# EAGLE board AtMEGA32u4-uSD-AddON-v01a (EAGLE 5.11)
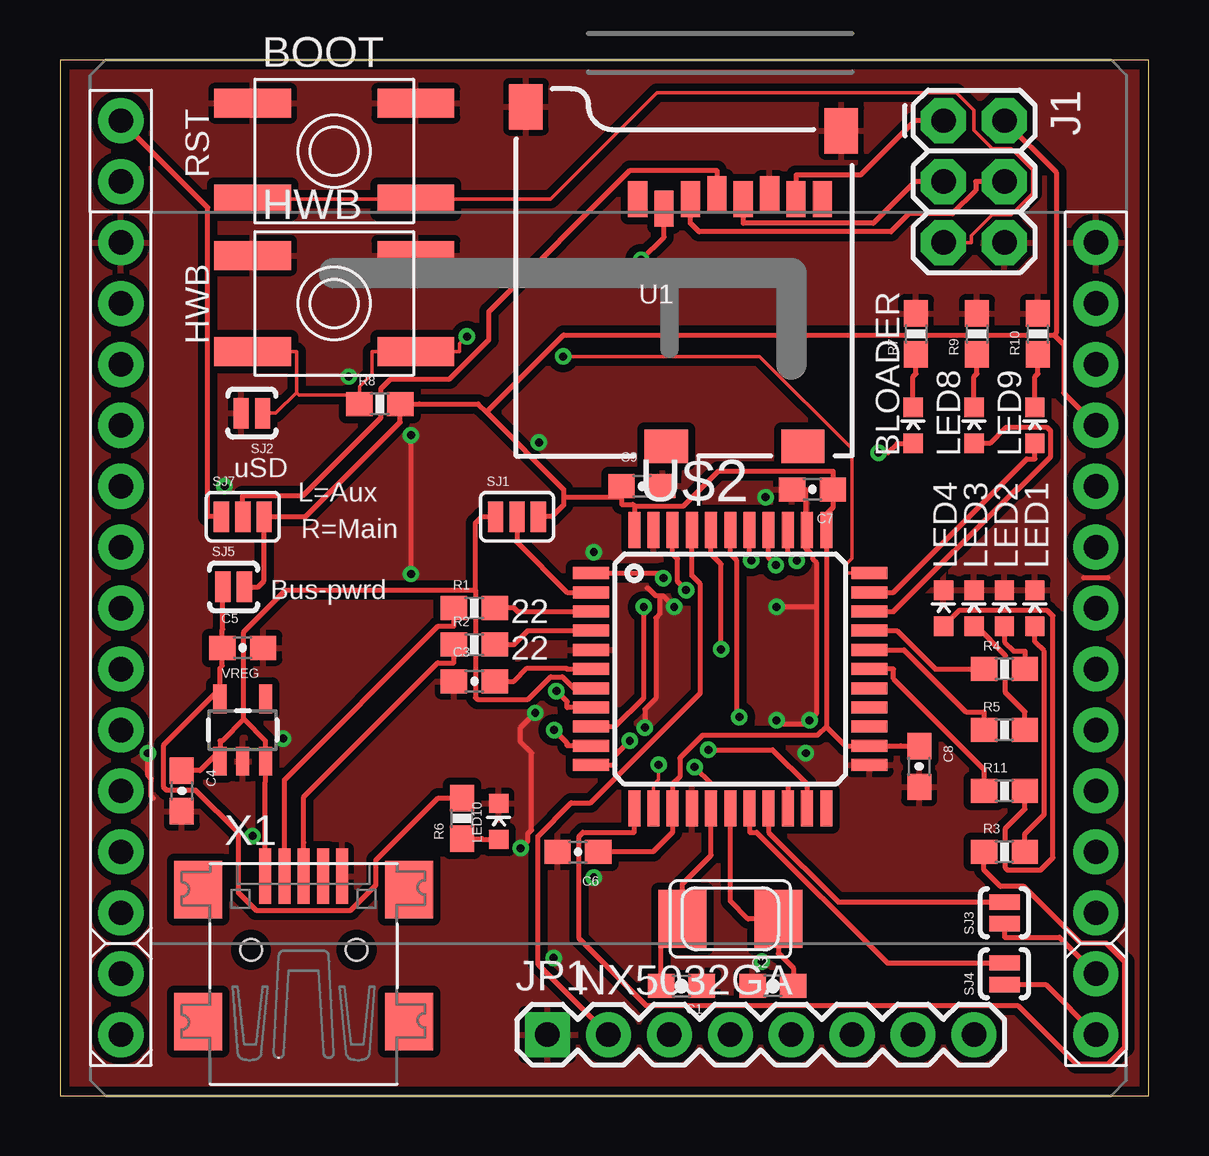
[diagram p0: board, top side]
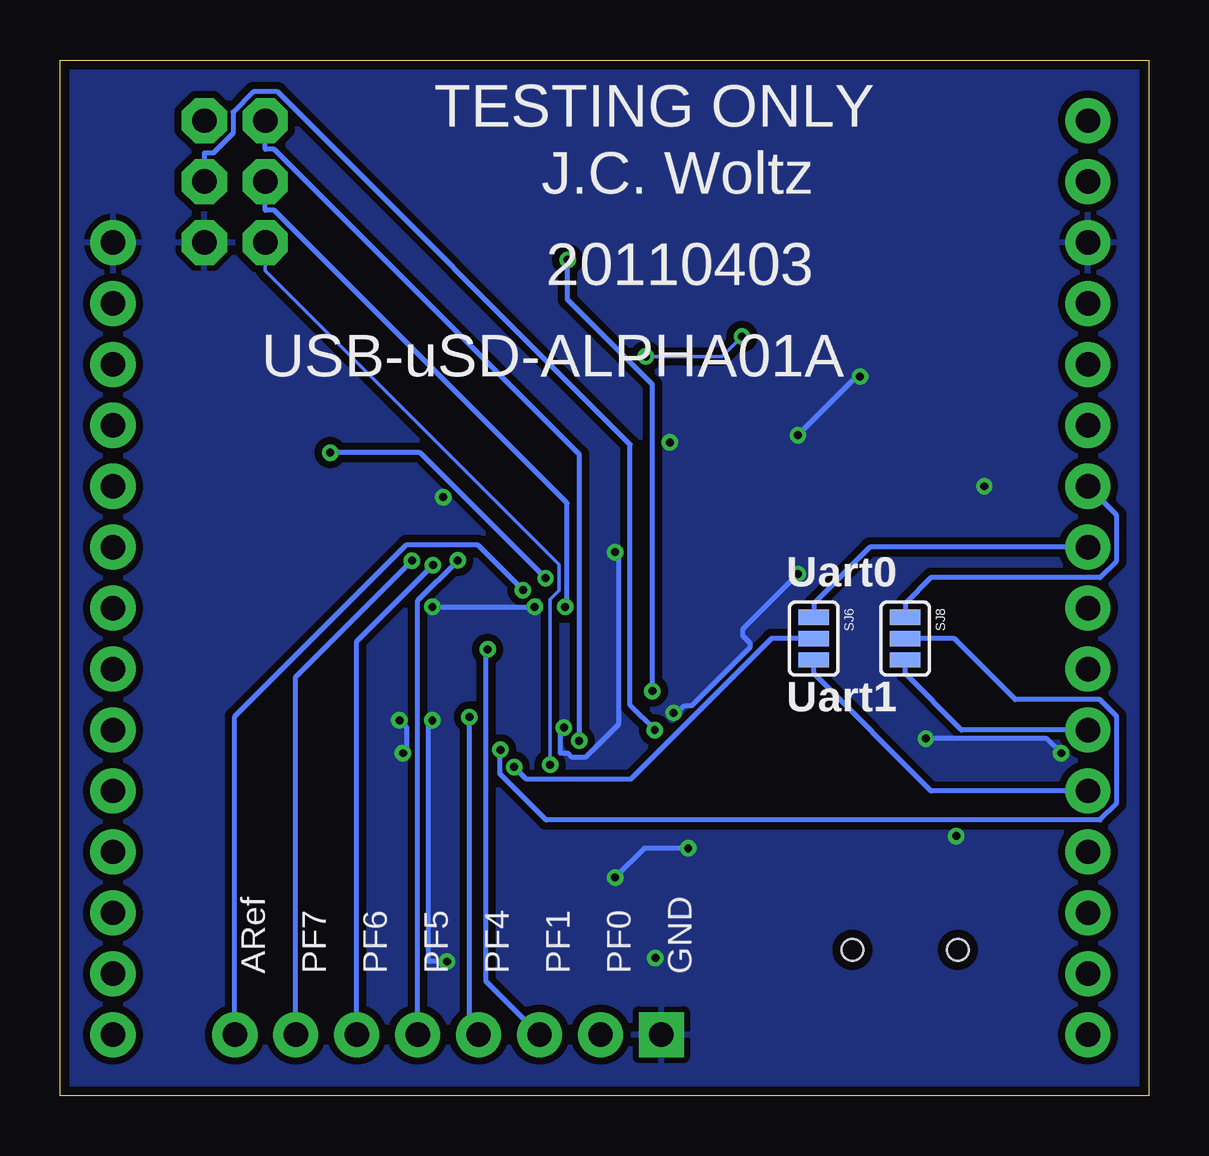
[diagram p1: board, bottom side, seen from below]

Size 45.39 x 43.17 mm. Coordinates in mm from the lower left corner, seen from the top.
Outline: 0,0 45.39,0 45.39,43.17 0,43.17 0,0
Copper layers (1*16): Top 0.0356mm / dielectric 1.5011mm / Bottom 0.0356mm
Design rules "LaenPCBOrder-JCModified": minimum track width 6mil, minimum drill 13mil, track to track 6mil, track to pad 6mil, pad to pad 6mil, via to via 6mil, smd to smd 6mil, copper to edge 15mil, drill to drill 6mil, minimum pad ring 12mil, minimum via ring 7mil, stop-mask expansion 4mil, vias tented up to drill 25mil, thermal gap 10mil
Net classes: 0 default: width 0.203 mm; 1 smallsignal: width 0.152 mm; 2 bigsignal: width 0.356 mm

## Footprints (pad centres in the part's own frame; a part is rotated, then mirrored left to right if it is on the bottom)
LED-0603 = smd 0.8 x 0.8: A 0,-0.75; C 0,0.75
EVQ-Q2 = smd 3.2 x 1.2: A -3.4,-2; A' 3.4,-2; B -3.4,2; B' 3.4,2
0603-CAP = smd 1.1 x 1: 1 -0.85,0; 2 0.85,0
2X3 = drill 1.016 pad 1.88 octagon: 1 0,0; 2 0,2.54; 3 2.54,0; 4 2.54,2.54; 5 5.08,0; 6 5.08,2.54
1X08 = drill 1.016 pad 1.88 square: 1 0,0 | drill 1.016 pad 1.88 round: 2 2.54,0; 3 5.08,0; 4 7.62,0; 5 10.16,0; 6 12.7,0; 7 15.24,0; 8 17.78,0
NX5032 = smd 2 x 2.4: P$1 2,0; P$2 -2,0
0603-RES = smd 1.1 x 1: 1 -0.85,0; 2 0.85,0
SJ_3_PASTE2&3 = smd 0.635 x 1.27: 1 -0.889,0; 2 0,0; 3 0.889,0
SJ_2S-NO = smd 0.635 x 1.27: 1 -0.45,0; 2 0.45,0
SJ_3_PASTE1&2 = smd 0.635 x 1.27: 1 -0.889,0; 2 0,0; 3 0.889,0
MICRO-SD-SOCKET-PP = smd 0.8 x 1.5: 1 -8.94,10.7; 2 -7.84,10.3; 3 -6.74,10.7; 4 -5.64,10.9; 5 -4.54,10.7; 6 -3.44,10.9; 7 -2.34,10.7; 8 -1.24,10.7 | smd 1.8 x 1.4: CD1 -2.05,0.4; CD2 -7.75,0.4 | smd 1.4 x 1.9: GND1 -13.6,14.55; GND3 -0.45,13.55
SYNSJ-STACK = drill 1.016 pad 1.88 round: G0 0,-7.62; G1 0,-10.16; G2 0,-12.7; G3 0,-15.24; G4 0,-17.78; G5 0,-20.32; G6 0,-22.86; G7 0,-25.4; G8 0,-27.94; G9 0,-30.48; G10 0,-33.02; G11 40.64,-33.02; G12 40.64,-30.48; G13 40.64,-27.94; G14 40.64,-25.4; G15 40.64,-22.86; G16 40.64,-20.32; G17 40.64,-17.78; G18 40.64,-15.24; GND 0,-5.08; GND1 40.64,-5.08; R1 0,0; R2 0,-2.54; R3 0,-35.56; R4 0,-38.1; R5 40.64,-38.1; R6 40.64,-35.56; RESERVED 40.64,-10.16; RESET 40.64,-7.62; VCC 40.64,-12.7
TQFP44 = smd 1.5 x 0.5: 1 -5.8,4; 2 -5.8,3.2; 3 -5.8,2.4; 4 -5.8,1.6; 5 -5.8,0.8; 6 -5.8,0; 7 -5.8,-0.8; 8 -5.8,-1.6; 9 -5.8,-2.4; 10 -5.8,-3.2; 11 -5.8,-4; 23 5.8,-4; 24 5.8,-3.2; 25 5.8,-2.4; 26 5.8,-1.6; 27 5.8,-0.8; 28 5.8,0; 29 5.8,0.8; 30 5.8,1.6; 31 5.8,2.4; 32 5.8,3.2; 33 5.8,4 | smd 0.5 x 1.5: 12 -4,-5.8; 13 -3.2,-5.8; 14 -2.4,-5.8; 15 -1.6,-5.8; 16 -0.8,-5.8; 17 0,-5.8; 18 0.8,-5.8; 19 1.6,-5.8; 20 2.4,-5.8; 21 3.2,-5.8; 22 4,-5.8; 34 4,5.8; 35 3.2,5.8; 36 2.4,5.8; 37 1.6,5.8; 38 0.8,5.8; 39 0,5.8; 40 -0.8,5.8; 41 -1.6,5.8; 42 -2.4,5.8; 43 -3.2,5.8; 44 -4,5.8
SOT23-5 = smd 0.55 x 1.2: 1 -0.95,-1.3; 2 0,-1.3; 3 0.95,-1.3; 4 0.95,1.3; 5 -0.95,1.3
USB-MINIB = smd 0.5 x 2.308: D+ 0,4.064; D- -0.8,4.064; GND 1.6,4.064; ID 0.8,4.064; VBUS -1.6,4.064 | smd 2 x 2.4: GND1 -4.4,-2; GND2 -4.4,3.5; GND3 4.4,3.5; GND4 4.4,-2 | hole 0.9: -2.2,1; 2.2,1

## Placement (x,y rotation side)
BLOADER  RED  [LED-0603]  35.56,27.94 0 top
BOOT  EVQQ2  [EVQ-Q2]  11.43,39.37 0 top
C1  12pF  [0603-CAP]  25.91,4.57 180 top
C2  12pF  [0603-CAP]  29.72,4.57 0 top
C3  1uF  [0603-CAP]  17.27,17.27 0 top
C4  1uF  [0603-CAP]  5.08,12.7 270 top
C5  1uF  [0603-CAP]  7.62,18.67 0 top
C6  1uF  [0603-CAP]  21.59,10.16 180 top
C7  1uF  [0603-CAP]  31.37,25.27 180 top
C8  1uF  [0603-CAP]  35.81,13.72 270 top
C9  1uF  [0603-CAP]  24.26,25.4 0 top
HWB  EVQQ2  [EVQ-Q2]  11.43,33.02 0 top
J1  AVR_SPI_PRG_6PTH  [2X3]  36.83,40.64 270 top
JP1  [1X08]  20.32,2.54 0 top
LED1  red  [LED-0603]  40.64,20.32 0 top
LED2  blue  [LED-0603]  39.37,20.32 0 top
LED3  orange  [LED-0603]  38.1,20.32 0 top
LED4  green  [LED-0603]  36.83,20.32 0 top
LED8  RED  [LED-0603]  38.1,27.94 0 top
LED9  RED  [LED-0603]  40.64,27.94 0 top
LED10  GREEN  [LED-0603]  18.29,11.43 0 top
NX5032GA  8MHz  [NX5032]  27.94,7.37 180 top
R1  22  [0603-RES]  17.27,20.32 0 top
R2  22  [0603-RES]  17.27,18.8 0 top
R3  220  [0603-RES]  39.37,10.16 0 top
R4  220  [0603-RES]  39.37,17.78 0 top
R5  220  [0603-RES]  39.37,15.24 0 top
R6  1K  [0603-RES]  16.76,11.56 90 top
R7  1K  [0603-RES]  35.69,31.75 90 top
R8  10K  [0603-RES]  13.33,28.83 0 top
R9  1K  [0603-RES]  38.23,31.75 90 top
R10  1K  [0603-RES]  40.77,31.75 90 top
R11  220  [0603-RES]  39.37,12.7 0 top
SJ1  [SJ_3_PASTE2&3]  19.05,24.13 0 top
SJ2  HWB  [SJ_2S-NO]  8,28.45 180 top
SJ3  SOLDERJUMPERNO  [SJ_2S-NO]  39.37,7.62 90 top
SJ4  SOLDERJUMPERNO  [SJ_2S-NO]  39.37,5.08 90 top
SJ5  SOLDERJUMPERNO  [SJ_2S-NO]  7.24,21.21 0 top
SJ6  [SJ_3_PASTE1&2]  13.97,19.05 270 bottom
SJ7  [SJ_3_PASTE1&2]  7.62,24.13 0 top
SJ8  [SJ_3_PASTE1&2]  10.16,19.05 270 bottom
U1  USD-SOCKETNEW  [MICRO-SD-SOCKET-PP]  33.02,26.67 0 top
U$1  SYNAPSE-SJ-STCKINGD30-1600  [SYNSJ-STACK]  2.54,40.64 0 top
U$2  ATMEGA32U4-AU  [TQFP44]  27.94,17.78 0 top
U$5  CREATIVE_COMMONS  [CREATIVE_COMMONS]  3.81,-8.89 0 top  (outside the outline)
VREG  MCP1802  [SOT23-5]  7.62,15.24 0 top
X1  USBSMD  [USB-MINIB]  10.16,5.08 0 top

## Library data of the parts
BLOADER C3-C9 LED1-LED4 LED8-LED10 R1-R11 U$1 U$5 VREG X1 = 0_jc-custom
BOOT HWB = adaprog
C1 C2 J1 JP1 SJ1-SJ8 = SparkFun
NX5032GA U$2 = adafruit
U1 = 0_jc-modified

## Nets
AREF-7: JP1.8 U$2.42
GND: BOOT.B BOOT.B' C1.1 C2.1 C3.1 C4.2 C5.2 C6.2 C7.2 C8.2 C9.2 HWB.B HWB.B' J1.6 JP1.1 LED1.C LED2.C LED3.C LED4.C LED10.C R7.2 R9.2 R10.2 SJ2.2 U1.6 U1.GND1 U1.GND3 U$1.GND U$1.GND1 U$2.5 U$2.15 U$2.23 U$2.35 U$2.43 VREG.2 X1.GND
HWB [smallsignal]: HWB.A HWB.A' R8.1 SJ2.1 U$2.33
MISO: J1.1 U1.7 U$2.11
MOSI: J1.4 U1.3 U$2.10
MVOUT: C5.1 R6.2 SJ5.1 VREG.5
N$1: LED9.C R10.1
N$2: LED1.A R3.2
N$3: SJ7.2 U1.4
N$4: C3.2 U$2.6
N$5: LED4.A R11.2
N$7: LED2.A R4.2
N$8: LED10.A R6.1
N$9: LED8.C R9.1
N$10: BLOADER.C R7.1
N$11: SJ3.1 U$1.R6
N$12: LED3.A R5.2
N$13: SJ4.1 U$1.R5
N$14: SJ8.1 U$1.G3
N$15: SJ6.1 U$1.G4
N$16: SJ8.3 U$1.G7
N$17: SJ6.3 U$1.G8
N$38: U1.CD1
N$40: U1.CD2
PB4-GRN-L4: R11.1 U$2.28
PB5-ORANGE-L3: R5.1 U$2.29
PB6-BLUE-L2: R4.1 U$2.30
PB7-RED-L1: R3.1 U$2.12
PC6-LED8: LED8.A U$2.31
PC7-LED9: LED9.A U$2.32
PD4: U$2.25
PD5: U$2.22
PD6: U$2.26
PD7: U$2.27
PE6-LED-BOOTLOADER: BLOADER.A U$2.1
PF0-2: JP1.2 U$2.41
PF1-3: JP1.3 U$2.40
PF4-4: JP1.4 U$2.39
PF5-5: JP1.5 U$2.38
PF6-6: JP1.6 U$2.37
PF7-7: JP1.7 U$2.36
RESET: U$1.RESET
RST [smallsignal]: BOOT.A BOOT.A' J1.5 U$2.13
RX1: SJ8.2 U$2.21
SCK: J1.3 U1.5 U$2.9
SCL: SJ4.2 U$2.18
SD_CS: U1.2 U$2.8
SDA: SJ3.2 U$2.19
TX1: SJ6.2 U$2.20
UD+: R2.2 U$2.4
UD-: R1.2 U$2.3
UDM: R1.1 X1.D-
UDP: R2.1 X1.D+
UVCC: SJ1.2 U$2.2
VBUS: C4.1 SJ1.1 U$2.7 VREG.1 VREG.3 X1.VBUS
VCC3: C6.1 C7.1 C8.1 C9.1 J1.2 R8.2 SJ1.3 SJ5.2 SJ7.3 U$1.VCC U$2.14 U$2.24 U$2.34 U$2.44
VCC3A: SJ7.1 U$1.R1
XTAL1: C2.2 NX5032GA.P$2 U$2.17
XTAL2: C1.2 NX5032GA.P$1 U$2.16

## Tracks (layer width: path | path; a pad name or v marks a point on that pad's centre or on a via)
AREF-7  (via drill 0.33 pad 0.69)
  Top 0.203: U$2.42 25.54,22.58 25.75,22.37 25.75,21.42 v26.1,21.07
  Bottom 0.203: v26.1,21.07 27.98,22.96 30.94,22.96 38.1,15.8 JP1.8
GND  (via drill 0.33)
  Top 0.203: v19.2,10.31 19.51,10.62 19.51,10.92 19.66,11.07 19.66,14.28 19.2,14.73 19.2,15.34 v19.81,15.95 | v14.63,21.74 v14.63,27.53 | C7.2 30.63,25.25 31.09,25.25 31.09,23.72 U$2.35 31.09,23.57 31.09,22.81 31.39,22.5 31.39,22.35 31.55,22.2 31.55,20.37 | v3.66,14.28 3.66,13.36 3.81,13.21 3.81,12.45 3.9,12.41 | 43.7,21.59 43.59,21.59 42.67,21.59 42.66,21.59 | 31.55,20.37 31.55,15.95 v31.24,15.65 31.09,15.49 29.87,15.49 v29.87,15.65 | 31.55,20.37 v29.87,20.37 | v25.6,20.37 25.15,20.83 24.99,20.83 | 24.99,20.83 24.84,20.83 24.54,21.13 24.49,21.15 | 24.99,20.83 24.99,20.07 24.84,19.91 24.84,16.56 24.38,16.1 v24.38,15.34
  Bottom 0.203: v22.25,9.09 21.03,10.31 v19.2,10.31 | v19.81,15.95 19.66,15.95 19.36,16.26 19.05,16.26 16.61,18.69 16.61,18.85 16.92,19.15 16.92,19.46 v14.63,21.74 | v14.63,27.53 12.19,29.97 v12.04,29.97 | v3.66,14.28 4.27,14.88 v9.3,14.88 | v31.24,15.65 30.94,15.34 30.94,14.28 v31.09,14.28 | v29.87,20.37 v25.6,20.37 | v29.87,15.65 30.02,15.49 30.02,5.59 v29.26,5.59 | v24.38,15.34 24.54,15.19 24.54,14.28 24.23,14.28 24.08,14.12 23.47,14.12 22.1,15.49 22.1,22.66 v22.25,22.66
  other vias: 29.41,24.94 20.57,5.74 6.86,25.4 19.96,27.23 8.03,10.82
  pour Bottom (isolate 0.305): 0,45.72 45.72,45.72 45.72,0 0,0
  pour Top (isolate 0.305): 0,45.72 45.72,45.72 45.72,0 0,0
HWB  (via drill 0.33 pad 0.69)
  Top 0.152: U$2.33 32.76,21.78 32.76,22.14 33.01,22.38 33.01,26.96 29.16,30.81 v20.97,30.81 | v16.96,31.65 16.66,31.34 16.66,31.02 HWB.A' 13,31.02 13,30.07 12.48,29.56 12.48,29.19 | 9.86,29.31 9.86,31.02 HWB.A | 9.86,29.31 9,28.45 SJ2.1 | 12.48,29.19 9.97,29.19 9.86,29.31 | 12.48,29.19 R8.1
  Bottom 0.152: v20.97,30.81 17.8,30.81 v16.96,31.65
MISO  (via drill 0.33 pad 0.69)
  Top 0.203: U$2.11 23.14,13.78 23.14,14.18 v23.75,14.79 | U1.7 30.68,38.37 33.37,38.37 35.64,40.64 J1.1
  Bottom 0.203: v23.75,14.79 23.74,14.8 23.74,26.73 36.46,39.45 36.83,39.45 J1.1
MOSI  (via drill 0.33 pad 0.69)
  Top 0.203: J1.4 38.18,38.1 38.18,37.73 37.2,36.75 35.39,36.75 34.64,36.01 26.64,36.01 26.28,36.37 U1.3 | U$2.10 21.14,14.58 21.14,14.7 v20.6,15.24
  Bottom 0.203: J1.4 39.37,39.29 39,39.29 38.18,40.12 38.18,41 37.33,41.84 36.32,41.84 21.63,27.15 21.63,16.27 v20.6,15.24
MVOUT
  Top 0.203: 6.67,16.97 4.33,14.62 4.33,12.84 4.44,12.73 5.67,12.73 7.44,10.95 7.44,8.45 8.17,7.73 12.12,7.73 13.17,8.78 13.17,9.82 15.76,12.41 R6.2 | 6.67,16.97 6.67,17.81 6.77,17.91 C5.1 6.77,19.42 6.79,19.44 SJ5.1 | 6.67,16.97 VREG.5
N$1
  Top 0.203: R10.1 40.77,30.1 40.64,29.97 LED9.C
N$2
  Top 0.203: LED1.A 40.64,18.92 41.02,18.53 41.02,11.72 40.22,10.91 R3.2
N$3
  Top 0.203: SJ7.2 7.62,25.02 10.14,25.02 13.38,28.26 13.38,29.47 13.79,29.88 16.25,29.88 17.88,31.51 17.88,32.69 23.77,38.57 27.38,38.57 U1.4
N$4
  Top 0.203: U$2.6 21.14,17.78 21.1,17.82 19.47,17.82 18.93,17.27 C3.2
N$5
  Top 0.203: R11.2 40.22,11.95 39.42,11.14 39.42,9.49 39.5,9.41 40.88,9.41 41.39,9.91 41.39,20 41.16,20.23 37.49,20.23 LED4.A
N$7
  Top 0.203: R4.2 40.22,18.53 39.75,18.53 39.37,18.92 LED2.A
N$8
  Top 0.203: LED10.A 17.63,10.68 17.61,10.71 R6.1
N$9
  Top 0.203: R9.1 38.23,30.1 38.1,29.97 LED8.C
N$10
  Top 0.203: R7.1 35.69,30.1 35.56,29.97 BLOADER.C
N$11
  Top 0.203: U$1.R6 41.66,6.6 39.37,6.6 SJ3.1
N$12
  Top 0.203: R5.2 40.22,15.99 39.42,16.8 39.42,18.34 38.19,19.57 LED3.A
N$13
  Top 0.203: U$1.R5 41.09,4.63 SJ4.1
N$14
  Bottom 0.203: SJ8.1 10.16,20.51 9.08,21.59 2.04,21.59 1.34,22.29 1.34,24.2 U$1.G3
N$15
  Bottom 0.203: SJ6.1 13.97,20.51 11.62,22.86 U$1.G4
N$16
  Bottom 0.203: SJ8.3 10.16,17.59 7.81,15.24 U$1.G7
N$17
  Bottom 0.203: SJ6.3 13.97,17.59 9.08,12.7 U$1.G8
PB4-GRN-L4
  Top 0.203: U$2.28 34.74,17.78 34.74,17.38 38.52,13.6 R11.1
PB5-ORANGE-L3
  Top 0.203: R5.1 38.52,15.99 37.77,15.99 35.18,18.58 U$2.29
PB6-BLUE-L2
  Top 0.203: U$2.30 34.88,19.38 36.48,17.78 R4.1
PB7-RED-L1
  Top 0.203: R3.1 38.52,9.41 39.21,8.72 40.19,8.72 42.55,6.35 43.62,6.35 44.39,5.58 44.39,2.01 43.7,1.33 42.36,1.33 39.92,3.76 24.42,3.76 21.64,6.55 21.64,10.81 21.8,10.98 23.94,10.98 U$2.12
PC6-LED8
  Top 0.203: LED8.A 38.75,27.19 39.41,27.84 41.16,27.84 41.3,27.71 41.3,26.64 39.91,25.25 39.82,25.25 34.74,20.18 U$2.31
PC7-LED9
  Top 0.203: LED9.A 40.64,26.54 40.3,26.54 34.74,20.98 U$2.32
PE6-LED-BOOTLOADER  (via drill 0.33 pad 0.69)
  Top 0.203: U$2.1 24.94,21.78 v25.15,21.57 | BLOADER.A 34.91,27.19 34.52,26.8 v34.12,26.8
  Bottom 0.203: v34.12,26.8 30.38,26.8 v25.15,21.57
PF0-2
  Top 0.203: JP1.2 19.92,5.48 19.92,10.81 21.31,12.2 22.12,12.2 26.69,16.78 26.69,21.32 26.34,21.67 | 26.34,21.67 | 26.34,21.67 U$2.41
PF1-3  (via drill 0.33 pad 0.69)
  Top 0.203: U$2.40 27.14,22.58 27.56,22.16 v27.56,18.6
  Bottom 0.203: JP1.3 27.63,4.77 27.63,18.53 v27.56,18.6
PF4-4  (via drill 0.33 pad 0.69)
  Top 0.203: v28.32,15.78 28.22,15.89 28.22,22.3 27.94,22.58 U$2.39
  Bottom 0.203: v28.32,15.78 28.32,2.92 JP1.4
PF5-5  (via drill 0.33 pad 0.69)
  Top 0.203: U$2.38 28.74,22.58 28.82,22.5 v28.82,22.31
  Bottom 0.203: v28.82,22.31 28.82,22.29 30.48,20.63 JP1.5
PF6-6  (via drill 0.33 pad 0.69)
  Top 0.203: U$2.37 29.54,22.41 v29.84,22.11
  Bottom 0.203: v29.84,22.11 33.02,18.93 JP1.6
PF7-7  (via drill 0.33 pad 0.69)
  Top 0.203: U$2.36 30.34,22.58 30.44,22.58 v30.72,22.3
  Bottom 0.203: v30.72,22.3 35.56,17.46 JP1.7
RST  (via drill 0.33 pad 0.69)
  Top 0.152: J1.5 38,35.56 38,35.85 38.88,36.73 39.66,36.73 40.55,37.62 40.55,38.58 39.66,39.47 38.86,39.47 38.1,40.23 38.1,41.08 37.37,41.81 24.89,41.81 20.45,37.37 BOOT.A' BOOT.A | U$2.13 24.74,12.96 24.96,13.17 v24.96,13.79
  Bottom 0.152: v24.96,13.79 24.96,20.67 24.58,21.05 24.58,22.14 36.83,34.39 J1.5
RX1  (via drill 0.33 pad 0.69)
  Top 0.203: U$2.21 31.14,12.98 29.71,14.42 v27.03,14.42
  Bottom 0.203: v27.03,14.42 27.05,14.39 27.05,13.41 25.12,11.48 2.04,11.48 1.34,12.18 1.34,15.81 2.04,16.51 5.58,16.51 8.12,19.05 SJ8.2
SCK  (via drill 0.33 pad 0.69)
  Top 0.203: U$2.9 23.14,15.38 24.33,16.57 v24.33,20.37 | U1.5 28.48,36.37 33.9,36.37 35.64,38.1 J1.3
  Bottom 0.203: v24.33,20.37 24.25,20.46 24.25,24.7 36.46,36.91 36.83,36.91 J1.3
SCL
  Top 0.203: U$2.18 28.74,10.98 29.04,10.98 34.48,5.53 SJ4.2
SD_CS  (via drill 0.33 pad 0.69)
  Top 0.203: U$2.8 21.14,16.18 21.14,16.42 v20.7,16.86 | U1.2 25.18,35.79 v24.23,34.84
  Bottom 0.203: v24.23,34.84 24.23,33.17 20.7,29.64 v20.7,16.86
SDA
  Top 0.203: U$2.19 29.54,10.98 32.45,8.07 SJ3.2
TX1  (via drill 0.33 pad 0.69)
  Top 0.203: U$2.20 30.34,12.98 27.17,12.98 v26.46,13.7
  Bottom 0.203: v26.46,13.7 25.94,13.18 21.6,13.18 15.73,19.05 SJ6.2
UD+
  Top 0.203: R2.2 18.93,18.8 19.51,19.38 U$2.4
UD-
  Top 0.203: R1.2 18.93,20.32 19.07,20.18 U$2.3
UDM
  Top 0.203: R1.1 16.42,19.57 15.76,19.57 9.36,13.16 X1.D-
UDP
  Top 0.203: X1.D+ 10.16,10.55 10.16,12.46 15.74,18.04 16.42,18.04 R2.1
UVCC
  Top 0.203: U$2.2 21.14,20.98 19.05,23.07 SJ1.2
VBUS
  Top 0.203: C4.1 5.83,13.55 6.65,14.37 6.67,14.37 | 6.67,14.37 6.67,14.79 6.76,14.79 7.67,15.7 | 6.67,14.37 VREG.1 | 7.67,15.7 7.67,19.33 9.41,21.07 17.32,21.07 | 7.67,15.7 8.57,14.79 VREG.3 8.57,13.09 8.56,13.09 8.56,10.55 X1.VBUS | U$2.7 21.42,16.98 20.94,17.46 20.45,17.46 19.51,16.52 17.4,16.52 17.32,16.6 17.32,21.07 | 17.32,21.07 17.32,23.86 17.59,24.13 SJ1.1
VCC3
  Top 0.203: 31.94,15.38 31.58,15.01 26.78,15.01 25.84,14.07 25.84,13.28 25.54,12.98 U$2.14 25.54,11.48 25.54,10.98 24.72,10.16 C6.1 | 31.94,15.38 32.74,14.58 U$2.24 35.05,14.58 35.06,14.57 C8.1 | 31.94,15.38 31.94,22.58 U$2.34 31.94,24.24 32.22,24.52 C7.1 32.22,26.03 27.44,26.03 26,24.58 23.94,24.58 | 41.44,31.7 41.54,31.81 41.54,38.47 J1.2 | 41.44,31.7 41.83,31.31 41.83,29.29 U$1.VCC | 17.78,28.48 21,31.7 41.44,31.7 | 17.78,28.48 17.44,28.83 14.99,28.83 R8.2 14.18,28.08 10.24,24.13 SJ7.3 8.51,21.46 8.26,21.21 SJ5.2 | 21,24.94 21,25.27 17.78,28.48 | 21,24.94 21,24.62 20.51,24.13 SJ1.3 | 23.41,24.94 23.41,24.65 23.88,24.65 23.94,24.58 | 23.41,24.94 C9.1 | 21,24.94 23.41,24.94 | 23.94,24.58 U$2.44
VCC3A
  Top 0.203: SJ7.1 6.16,24.13 6.16,37.02 U$1.R1
XTAL1
  Top 0.203: U$2.17 27.94,8.11 28.69,7.37 NX5032GA.P$2 29.94,5.91 29.98,5.91 30.57,5.33 C2.2
XTAL2
  Top 0.203: 25.94,8.09 25.06,7.21 C1.2 | 25.94,8.09 25.94,8.82 27.14,10.02 U$2.16 | 25.94,8.09 NX5032GA.P$1

## Text on the board
tPlace: RST | HWB | uSD | L=Aux | R=Main | Bus-pwrd
bPlace: TESTING ONLY | J.C. Woltz | 20110403 | USB-uSD-ALPHA01A | Uart0 | Uart1 | GND | PF0 | PF1 | PF4 | PF5 | PF6 | PF7 | ARef